# Altium PCB PCB1.PcbDoc (part 2 of 2)
Units mm, origin at the board's own origin, x right, y up, seen from the top; angles counter-clockwise.
Board outline 98 x 50 mm, 2 copper layers (Top Layer, Bottom Layer), stack 1.534 mm thick; 54 components, 28 nets, 136 pads, 101 vias.
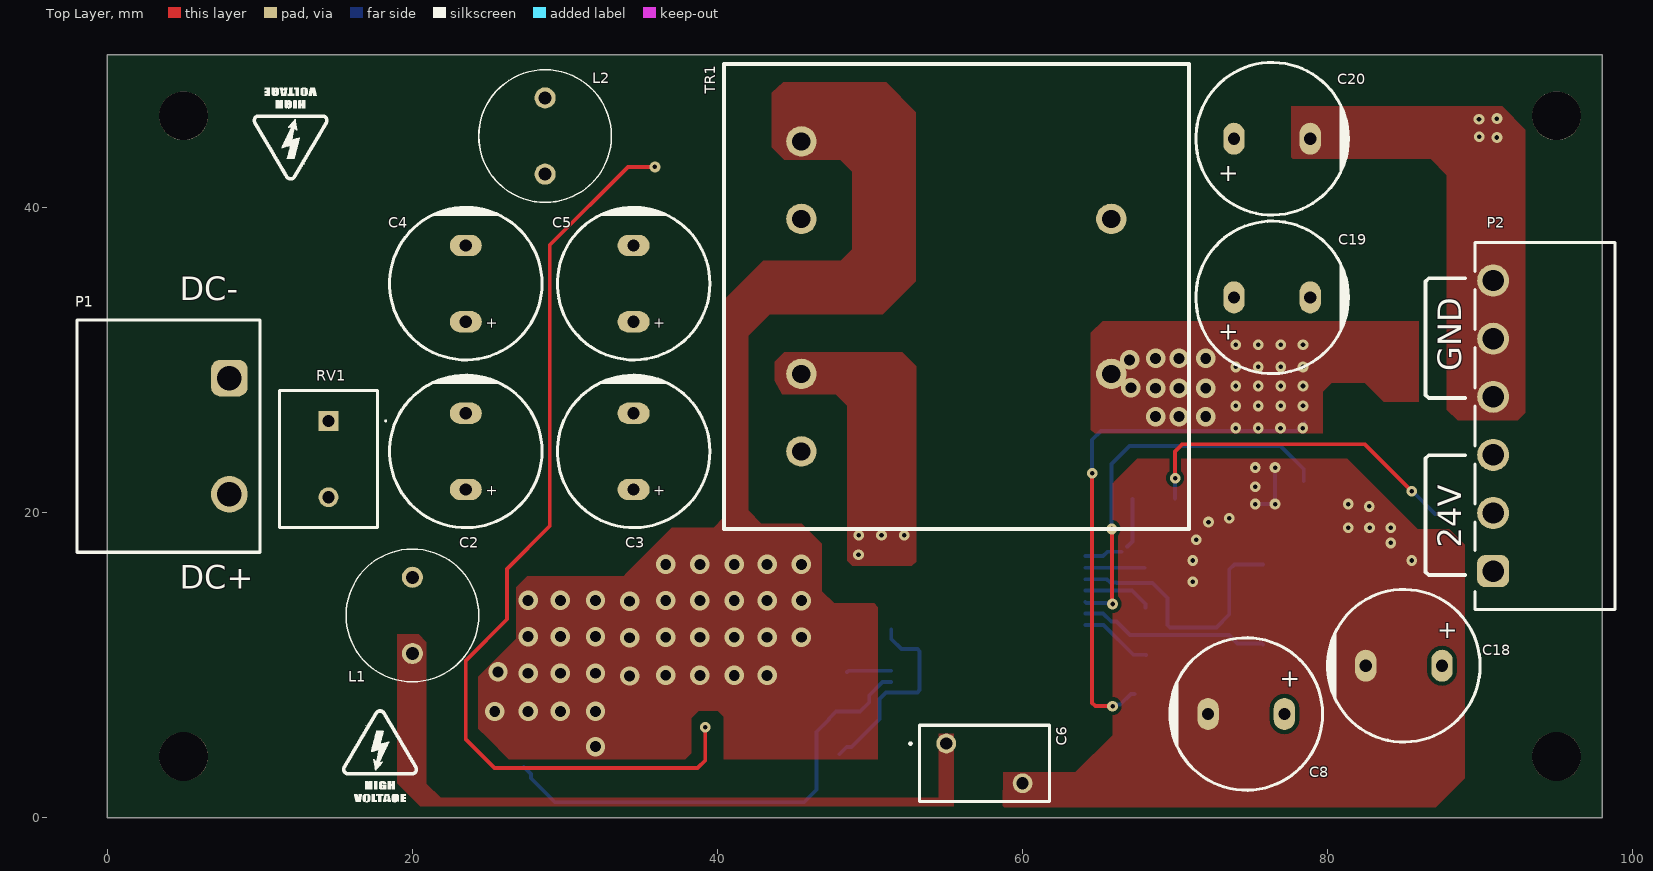
[diagram p0: Top Layer view]

## Silkscreen, mask and mechanical layers (free items; w line width, h text height) (continued)
Top 3D Body: (continued)
  lines w0.254: -4.508,1.524 -4,0 ; -4.508,48.476 -4,50 ; -4.254,0 -3.746,0 ; -4.254,50 -3.746,50 ; -4,19.896 -4,0 ; -4,30.104 -4,50 ; -3.492,1.524 -4,0 ; -3.492,48.476 -4,50 ; 0,51.746 0,52.254 ; 1.524,51.492 0,52 ; 1.524,52.508 0,52 ; 43.896,52 0,52 ; 54.104,52 98,52 ; 96.476,51.492 98,52 ; 96.476,52.508 98,52 ; 98,51.746 98,52.254
  text "98 (mm)" at 44.15,51.086 h1.52
  text "50 (mm)" at -3.086,20.15 h1.52 r90

## Text inside footprints (layer, text, board x,y; h text height)
C2: Top Overlay "+" at 24.9,21.8 h0.7 r270
C3: Top Overlay "+" at 35.9,21.8 h0.7 r270
C4: Top Overlay "+" at 24.9,32.8 h0.7 r270
C5: Top Overlay "+" at 35.9,32.8 h0.7 r270
C8: Top Overlay "+" at 76.862,8.187 h2
C18: Top Overlay "+" at 87.196,11.352 h2
C19: Top Overlay "+" at 74.156,32.7 h2 r180
C20: Top Overlay "+" at 74.156,43.1 h2 r180